# EAGLE board main LF (EAGLE 9.6.2)
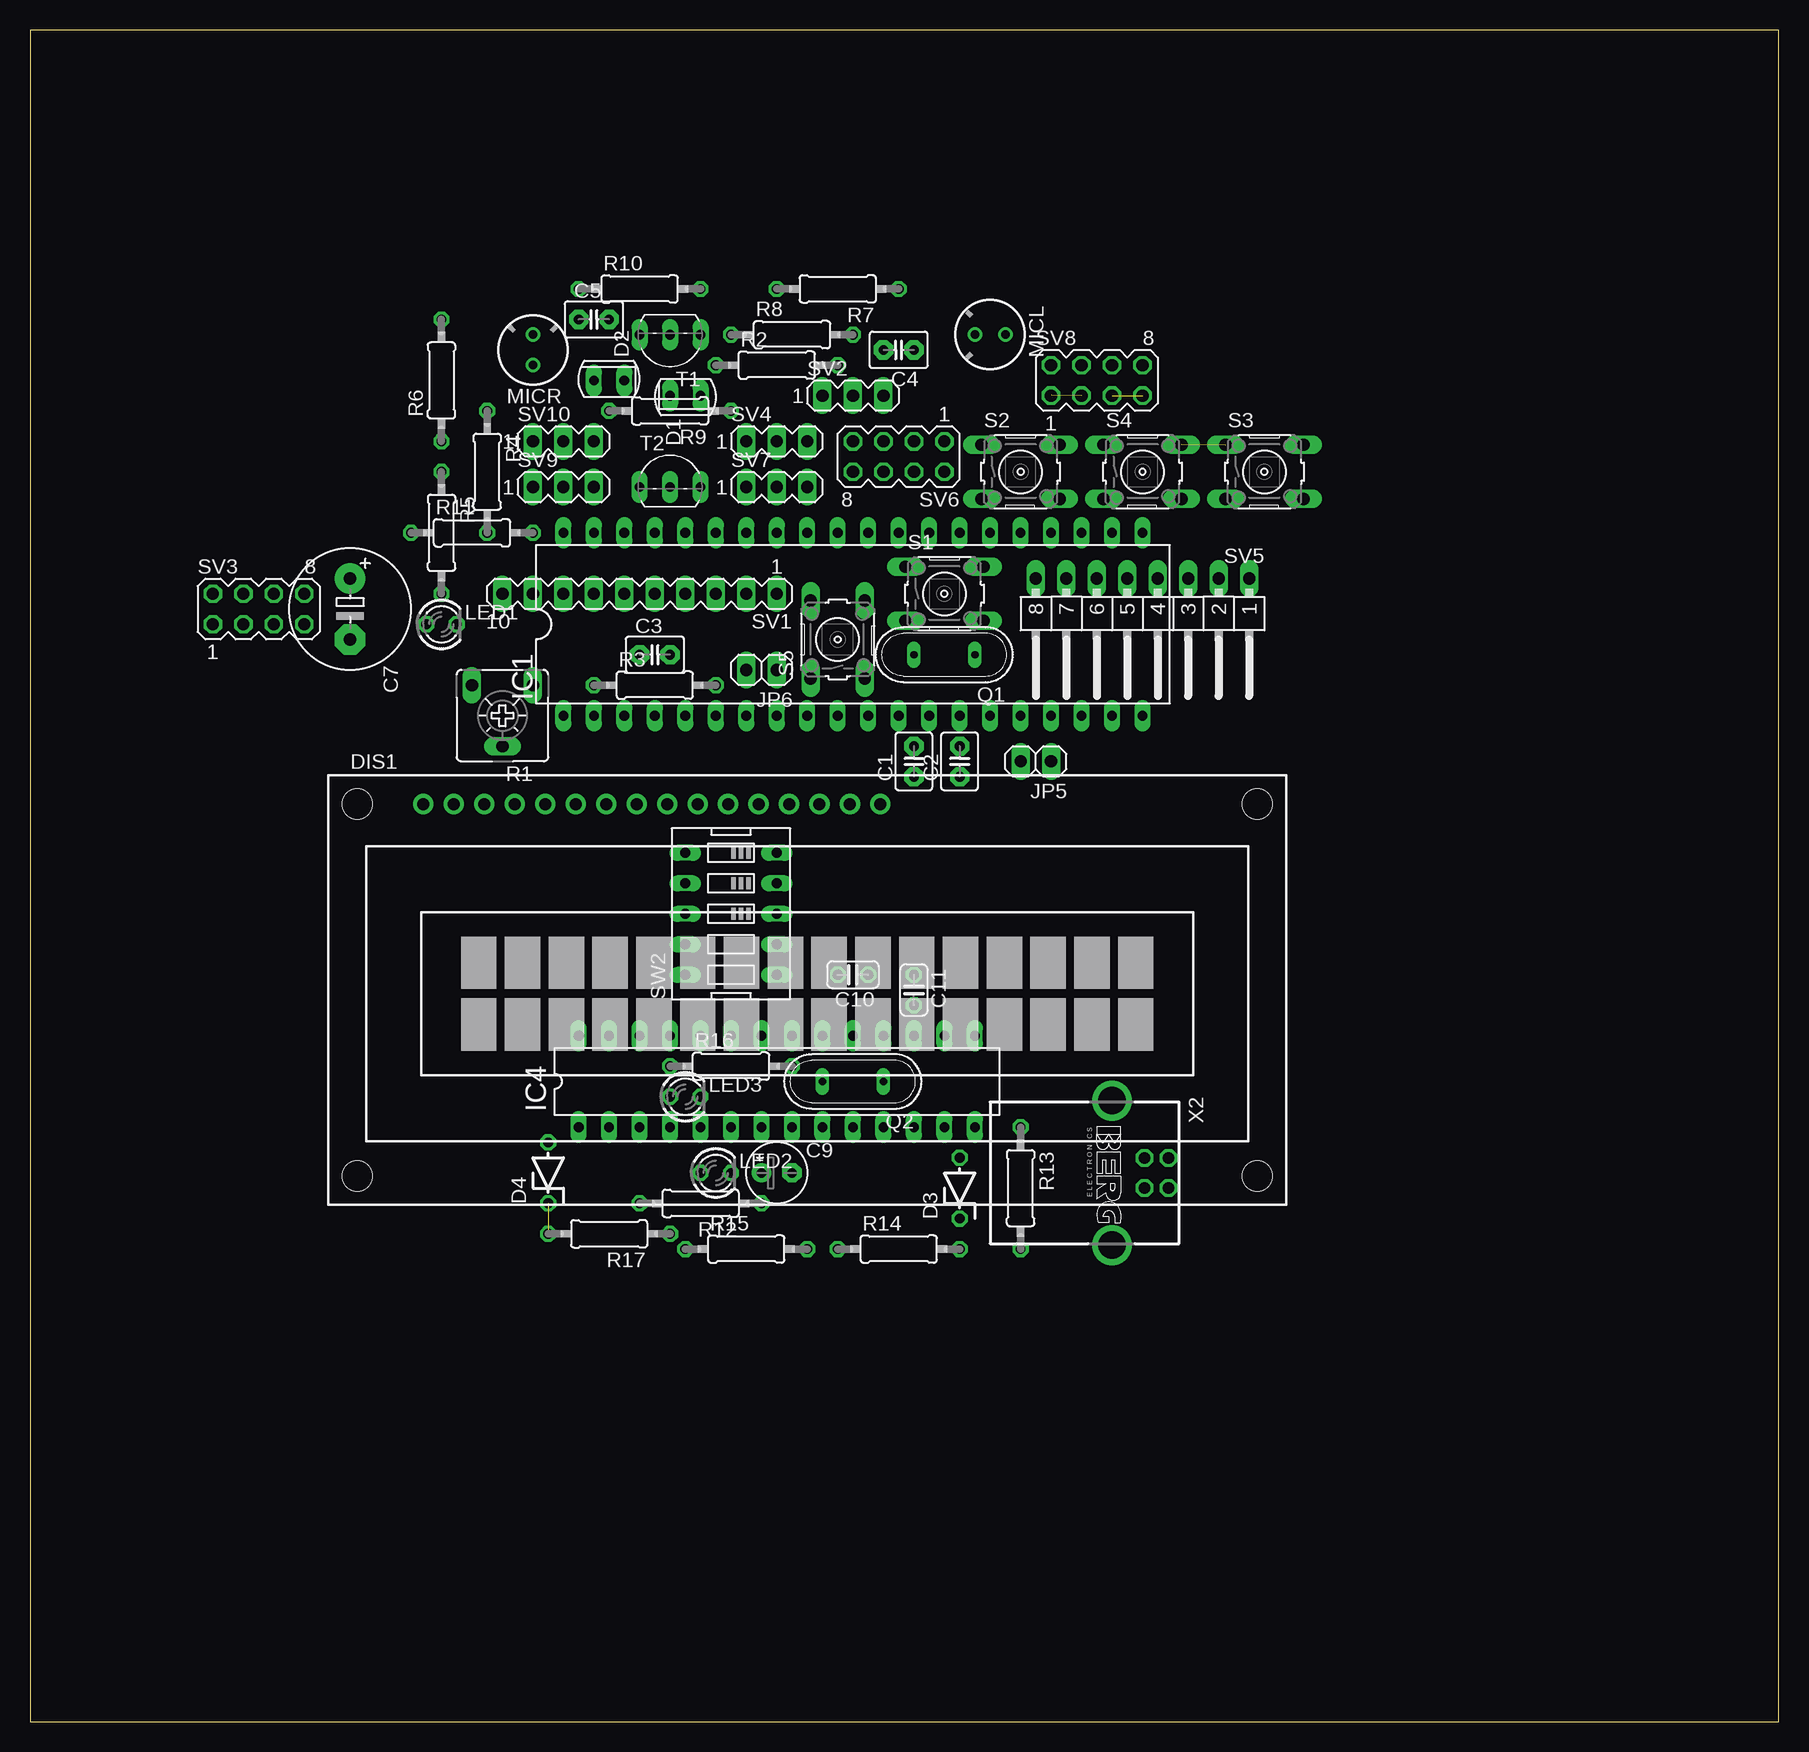
[diagram p0: board, top side]
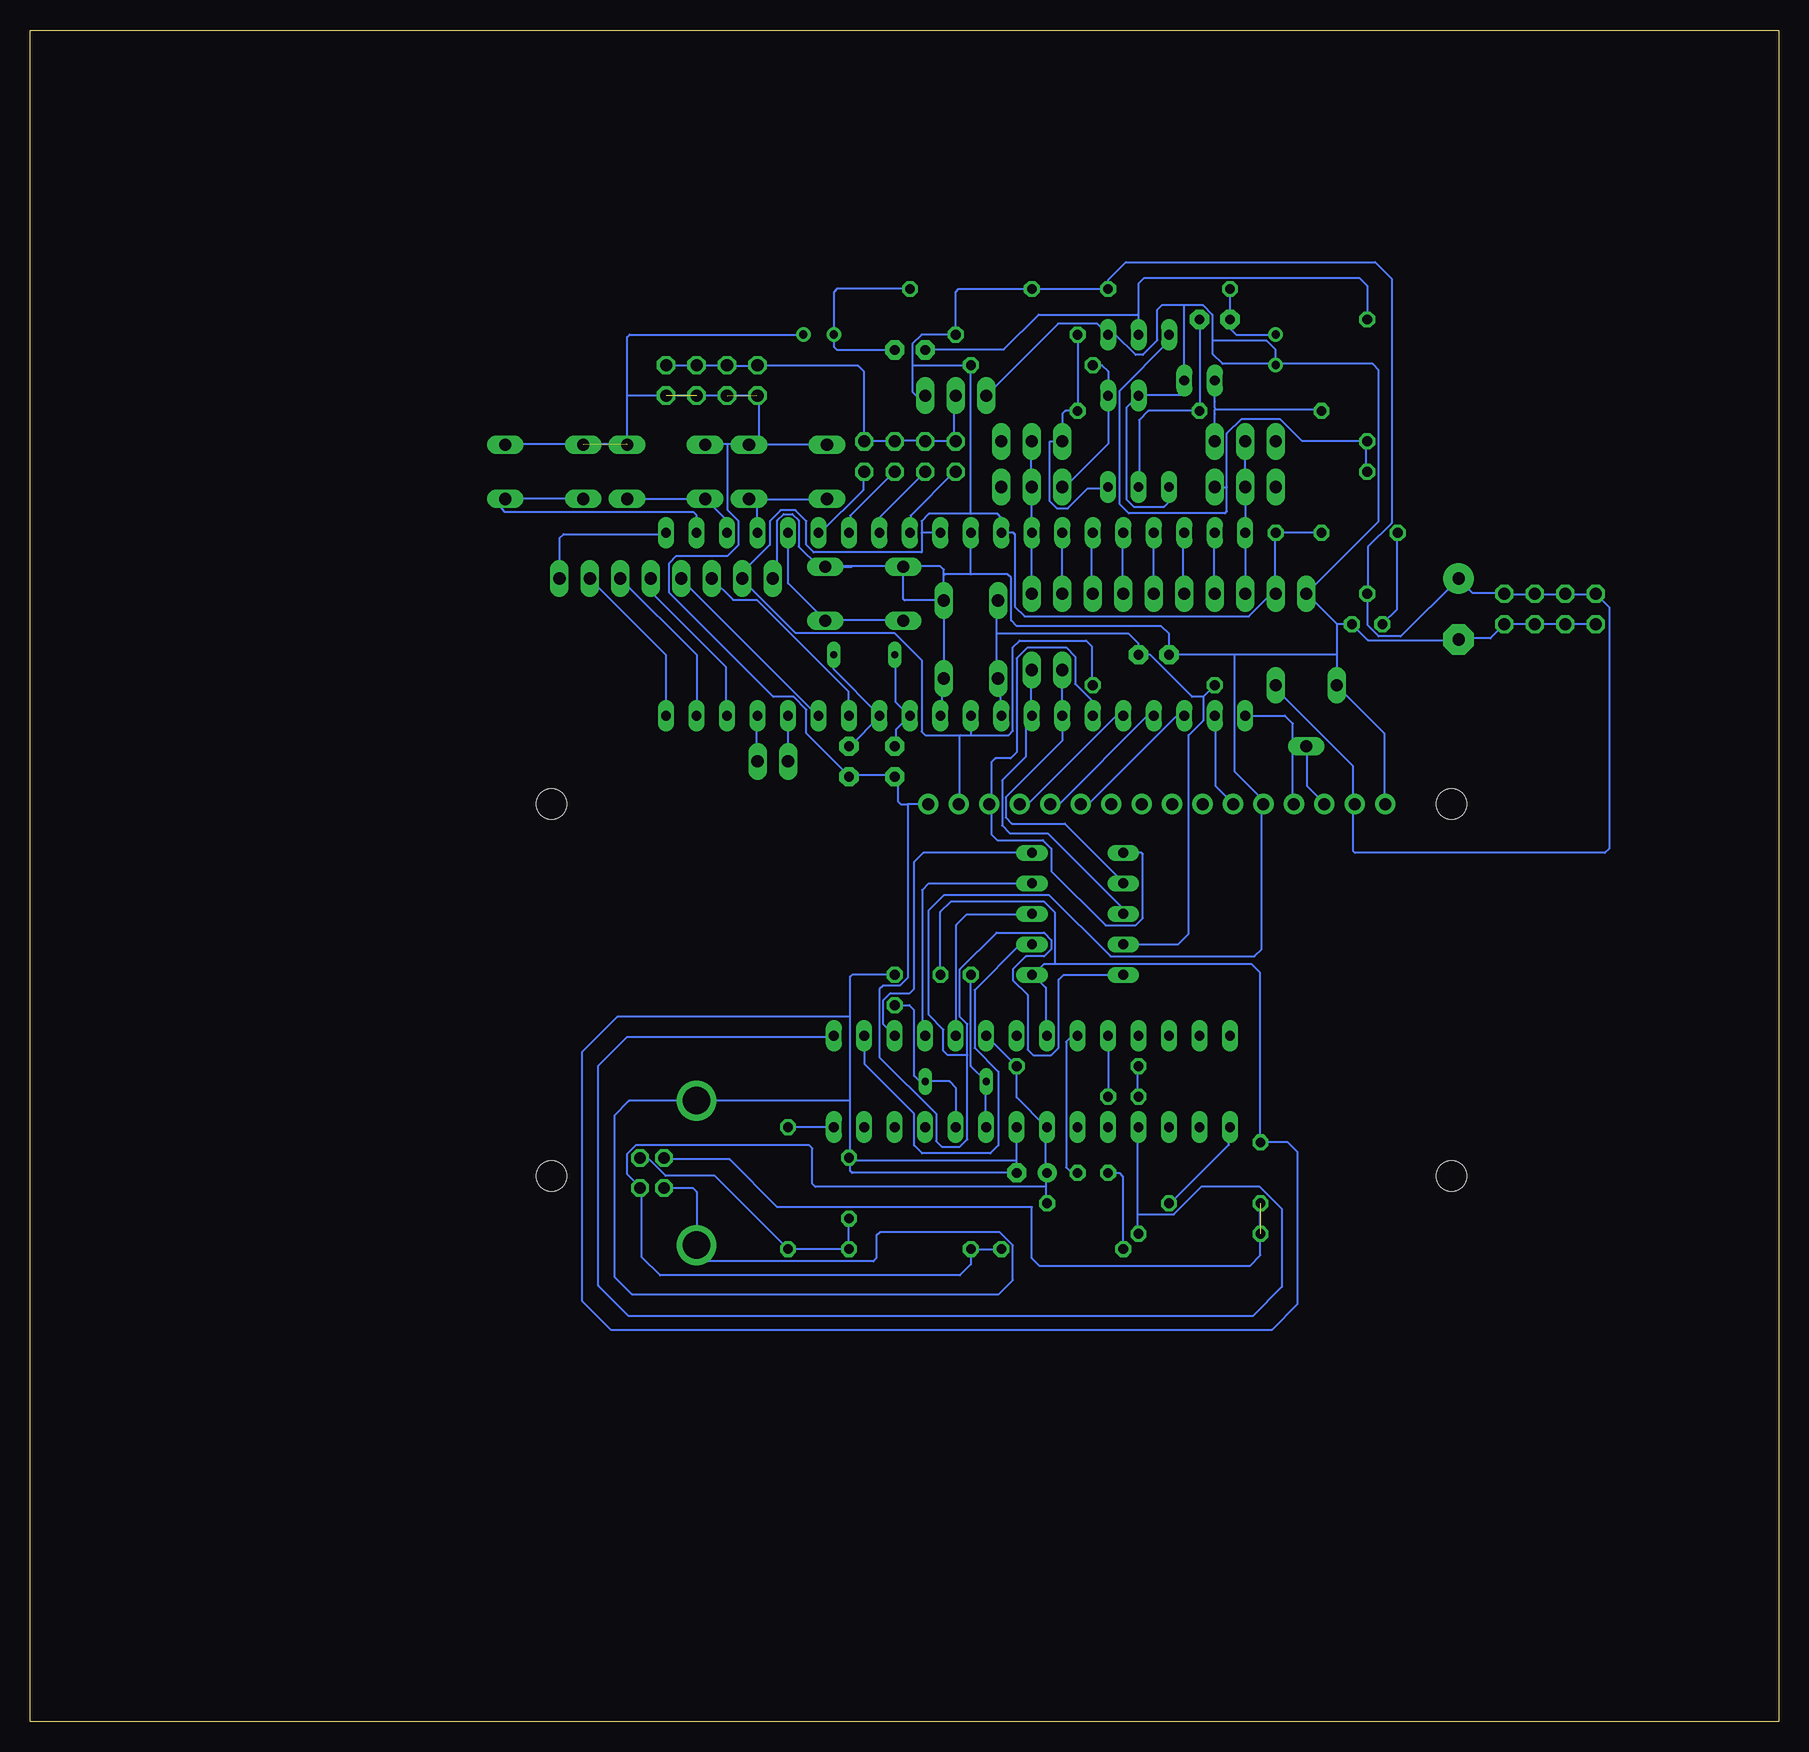
[diagram p1: board, bottom side, seen from below]

Size 145.72 x 140.96 mm. Coordinates in mm from the lower left corner, seen from the top.
Outline: 0,0 145.72,0 145.72,140.96 0,140.96 0,0
Copper layers (1*16): Top 0.035mm / dielectric 1.5mm / Bottom 0.035mm
Design rules "default": minimum track width 6mil, minimum drill 0.35mm, track to track 6mil, track to pad 6mil, pad to pad 6mil, via to via 6mil, smd to smd 6mil, copper to edge 40mil, drill to drill 6mil, minimum pad ring 10mil, minimum via ring 8mil, stop-mask expansion 4mil, vias tented up to drill 0mil, thermal gap 10mil

## Footprints (pad centres in the part's own frame; a part is rotated, then mirrored left to right if it is on the bottom)
C2.5-3 = drill 0.813 pad 1.6 octagon: 1 -1.27,0; 2 1.27,0
E5-10,5 = drill 1.016 pad 2.54: + -2.54,0 | drill 1.016 pad 2.54 octagon: - 2.54,0
E2,5-5 = drill 0.813 pad 1.6: + -1.27,0 | drill 0.813 pad 1.6 octagon: - 1.27,0
C025-024X044 = drill 0.813 octagon: 1 -1.27,0; 2 1.27,0
SFH225 = drill 0.813 long: A 0,1.27; K 0,-1.27
ZDIO-5 = drill 0.813 octagon: A 2.54,0; C -2.54,0
TUXGR_16X2_R2 = drill 1 pad 1.676: 1 -32,15.5; 2 -29.46,15.5; 3 -26.92,15.5; 4 -24.38,15.5; 5 -21.84,15.5; 6 -19.3,15.5; 7 -16.76,15.5; 8 -14.22,15.5; 9 -11.68,15.5; 10 -9.14,15.5; 11 -6.6,15.5; 12 -4.06,15.5; 13 -1.52,15.5; 14 1.02,15.5; 15 3.56,15.5; 16 6.1,15.5 | hole 2.5: -37.5,-15.5; 37.5,-15.5; -37.5,15.5; 37.5,15.5
DIL40 = drill 0.813 long: 1 -24.13,-7.62; 2 -21.59,-7.62; 3 -19.05,-7.62; 4 -16.51,-7.62; 5 -13.97,-7.62; 6 -11.43,-7.62; 7 -8.89,-7.62; 8 -6.35,-7.62; 9 -3.81,-7.62; 10 -1.27,-7.62; 11 1.27,-7.62; 12 3.81,-7.62; 13 6.35,-7.62; 14 8.89,-7.62; 15 11.43,-7.62; 16 13.97,-7.62; 17 16.51,-7.62; 18 19.05,-7.62; 19 21.59,-7.62; 20 24.13,-7.62; 21 24.13,7.62; 22 21.59,7.62; 23 19.05,7.62; 24 16.51,7.62; 25 13.97,7.62; 26 11.43,7.62; 27 8.89,7.62; 28 6.35,7.62; 29 3.81,7.62; 30 1.27,7.62; 31 -1.27,7.62; 32 -3.81,7.62; 33 -6.35,7.62; 34 -8.89,7.62; 35 -11.43,7.62; 36 -13.97,7.62; 37 -16.51,7.62; 38 -19.05,7.62; 39 -21.59,7.62; 40 -24.13,7.62
DIL28-3 = drill 0.813 long: 1 -16.51,-3.81; 2 -13.97,-3.81; 3 -11.43,-3.81; 4 -8.89,-3.81; 5 -6.35,-3.81; 6 -3.81,-3.81; 7 -1.27,-3.81; 8 1.27,-3.81; 9 3.81,-3.81; 10 6.35,-3.81; 11 8.89,-3.81; 12 11.43,-3.81; 13 13.97,-3.81; 14 16.51,-3.81; 15 16.51,3.81; 16 13.97,3.81; 17 11.43,3.81; 18 8.89,3.81; 19 6.35,3.81; 20 3.81,3.81; 21 1.27,3.81; 22 -1.27,3.81; 23 -3.81,3.81; 24 -6.35,3.81; 25 -8.89,3.81; 26 -11.43,3.81; 27 -13.97,3.81; 28 -16.51,3.81
1X02 = drill 1.016 long: 1 -1.27,0; 2 1.27,0
LED3MM = drill 0.813 octagon: A -1.27,0; K 1.27,0
F6050AP = drill 0.7 pad 1.2: 1 0,1.27; 2 0,-1.27
QS = drill 0.61 long: 1 -2.54,0; 2 2.54,0
CA6V = drill 1.016 long: A -2.54,-2.54; E 2.54,-2.54; S 0,2.54
0207/10 = drill 0.813 octagon: 1 -5.08,0; 2 5.08,0
B3F-10XX = drill 1.016 long: 1 -3.251,2.261; 2 3.251,2.261; 3 -3.251,-2.261; 4 3.251,-2.261
MA10-1 = drill 1.016 long: 1 -11.43,0; 2 -8.89,0; 3 -6.35,0; 4 -3.81,0; 5 -1.27,0; 6 1.27,0; 7 3.81,0; 8 6.35,0; 9 8.89,0; 10 11.43,0
MA03-1 = drill 1.016 long: 1 -2.54,0; 2 0,0; 3 2.54,0
MA04-2 = drill 1.016 octagon: 1 -3.81,-1.27; 2 -3.81,1.27; 3 -1.27,-1.27; 4 -1.27,1.27; 5 1.27,-1.27; 6 1.27,1.27; 7 3.81,-1.27; 8 3.81,1.27
MA08-1W = drill 1.016 long: 1 -8.89,0; 2 -6.35,0; 3 -3.81,0; 4 -1.27,0; 5 1.27,0; 6 3.81,0; 7 6.35,0; 8 8.89,0
EDG-05 = drill 0.813 long: 1 -5.08,-3.81; 2 -2.54,-3.81; 3 0,-3.81; 4 2.54,-3.81; 5 5.08,-3.81; 6 5.08,3.81; 7 2.54,3.81; 8 0,3.81; 9 -2.54,3.81; 10 -5.08,3.81
TO92-EBC = drill 0.813 long: B 0,-1.27; C 2.54,-1.27; E -2.54,-1.27
PN61729-S = drill 0.95 octagon: 1 1.25,4.71; 2 -1.25,4.71; 3 -1.25,2.71; 4 1.25,2.71 | drill 2.3 pad 2.9: S1 -6.02,0; S2 6.02,0

## Placement (x,y rotation side)
C1  22p  [C2.5-3]  73.66,80.01 90 top
C2  22p  [C2.5-3]  77.47,80.01 90 top
C3  10nF  [C2.5-3]  52.07,88.9 0 top
C4  100nF  [C2.5-3]  72.39,114.3 180 top
C5  100nF  [C2.5-3]  46.99,116.84 0 top
C7  1000uF/16V  [E5-10,5]  26.67,92.71 270 top
C9  10uF/16V  [E2,5-5]  62.23,45.72 0 top
C10  22pF  [C025-024X044]  68.58,62.23 180 top
C11  22pF  [C025-024X044]  73.66,60.96 270 top
D1  SFH225  [SFH225]  54.61,110.49 270 top
D2  SFH225  [SFH225]  48.26,111.76 90 top
D3  DZ3,6V  [ZDIO-5]  77.47,44.45 90 top
D4  DZ3,6V  [ZDIO-5]  43.18,45.72 90 top
DIS1  TUXGR_16X2_R2  [TUXGR_16X2_R2]  64.77,60.96 0 top
IC1  MEGA16-P  [DIL40]  68.58,91.44 0 top
IC4  MEGA8-P  [DIL28-3]  62.23,53.34 0 top
JP5  [1X02]  83.82,80.01 180 top
JP6  [1X02]  60.96,87.63 180 top
LED1  merah  [LED3MM]  34.29,91.44 0 top
LED2  Merah  [LED3MM]  57.15,45.72 0 top
LED3  hijau  [LED3MM]  54.61,52.07 0 top
MICL  MC  [F6050AP]  80.01,115.57 270 top
MICR  MC  [F6050AP]  41.91,114.3 180 top
Q1  8MHz  [QS]  76.2,88.9 180 top
Q2  12MHz  [QS]  68.58,53.34 180 top
R1  20K  [CA6V]  39.37,83.82 180 top
R2  56K  [0207/10]  62.23,113.03 0 top
R3  10K  [0207/10]  52.07,86.36 0 top
R4  56K  [0207/10]  38.1,104.14 270 top
R5  10K  [0207/10]  34.29,99.06 270 top
R6  100K  [0207/10]  34.29,111.76 90 top
R7  10K  [0207/10]  67.31,119.38 180 top
R8  10K  [0207/10]  63.5,115.57 0 top
R9  100K  [0207/10]  53.34,109.22 180 top
R10  10K  [0207/10]  50.8,119.38 0 top
R11  330  [0207/10]  36.83,99.06 0 top
R12  10K  [0207/10]  55.88,43.18 180 top
R13  68  [0207/10]  82.55,44.45 270 top
R14  2K2  [0207/10]  72.39,39.37 0 top
R15  330  [0207/10]  59.69,39.37 0 top
R16  330  [0207/10]  58.42,54.61 0 top
R17  68  [0207/10]  48.26,40.64 180 top
S1  [B3F-10XX]  76.2,93.98 0 top
S2  [B3F-10XX]  82.55,104.14 0 top
S3  [B3F-10XX]  102.87,104.14 0 top
S4  [B3F-10XX]  92.71,104.14 0 top
S5  [B3F-10XX]  67.31,90.17 90 top
SV1  [MA10-1]  50.8,93.98 180 top
SV2  [MA03-1]  68.58,110.49 0 top
SV3  [MA04-2]  19.05,92.71 0 top
SV4  [MA03-1]  62.23,106.68 0 top
SV5  [MA08-1W]  92.71,95.25 180 top
SV6  [MA04-2]  72.39,105.41 180 top
SV7  [MA03-1]  62.23,102.87 0 top
SV8  [MA04-2]  88.9,111.76 0 top
SV9  [MA03-1]  44.45,102.87 0 top
SV10  [MA03-1]  44.45,106.68 0 top
SW2  [EDG-05]  58.42,67.31 90 top
T1  [TO92-EBC]  53.34,114.3 180 top
T2  [TO92-EBC]  53.34,104.14 0 top
X2  PN61729-S  [PN61729-S]  90.17,45.72 270 top

## Library data of the parts
C1-C5 = capacitor-wima
C7 C9-C11 R2-R11 = rcl
D1 D2 = opto-trans-siemens; OC_FARNELL: unknown; OC_NEWARK: unknown
D3 D4 = diode
DIS1 = display-lcd; OC_FARNELL: unknown; OC_NEWARK: unknown
IC1 = atmel; MPN: ATMEGA16-16PU; OC_FARNELL: 9171142; OC_NEWARK: 01M6885
IC4 = atmel
JP5 JP6 = pinhead
LED1-LED3 = led
MICL MICR = microphon
Q1 Q2 SW2 = special
R1 = pot
R12-R17 = resistor
S1-S5 = switch-omron; MPN: B3F-1000; OC_FARNELL: 176432; OC_NEWARK: 36M3542
SV1-SV10 = con-lstb; OC_FARNELL: unknown; OC_NEWARK: unknown
T1 T2 = transistor
X2 = con-berg

## Nets
DGND: C9.- C10.1 C11.1 D3.A D4.A IC4.8 IC4.22 SW2.1 X2.4 X2.S1 X2.S2
GND: C1.1 C2.1 C3.1 C7.- D1.K D2.K DIS1.1 DIS1.5 DIS1.16 IC1.11 IC1.31 LED1.K MICL.1 MICR.1 R1.E S1.1 S1.2 S2.1 S2.2 S3.1 S3.2 S4.1 S4.2 S5.3 S5.4 SV1.10 SV2.1 SV3.1 SV3.3 SV3.5 SV3.7 SV5.8 SV8.1 SV8.3 SV8.5 SV8.7 SW2.10 T1.E T2.E
MISO: IC1.7 JP6.2 SW2.7
MOSI: DIS1.14 IC1.6 SW2.6
N$1: IC1.33 SV1.1 SV4.2 SV7.2
N$2: IC1.34 SV1.2
N$3: IC1.35 SV1.3
N$4: IC1.36 SV1.4
N$5: IC1.37 SV1.5
N$6: IC1.38 SV1.6
N$7: IC1.39 SV1.7
N$8: D2.A R4.1 SV10.3
N$9: IC1.24 S2.3 S2.4
N$10: DIS1.13 IC1.5
N$11: DIS1.12 IC1.4
N$12: DIS1.11 IC1.3
N$13: DIS1.6 IC1.2
N$14: R5.1 R6.1 SV9.3 T1.C
N$15: DIS1.3 R1.S
N$16: C1.2 IC1.12 Q1.2
N$17: C2.2 IC1.13 Q1.1
N$18: DIS1.4 IC1.1
N$19: D1.A R2.1 SV7.1
N$20: IC1.23 S4.3 S4.4
N$21: IC1.40 SV1.8 SV9.2 SV10.2
N$22: C4.2 R6.2 T1.B
N$23: C4.1 MICL.2 R7.1
N$24: R8.1 R9.1 SV4.1 T2.C
N$25: C5.2 R9.2 T2.B
N$26: C5.1 MICR.2 R10.1
N$27: IC1.22 S3.3 S3.4
N$28: IC1.25 S1.3 S1.4
N$30: IC1.21 SV5.1
N$32: IC1.20 SV5.2
N$33: IC1.19 SV5.3
N$34: IC1.18 SV5.4
N$35: IC1.15 SV5.5
N$36: IC1.14 SV5.6
N$37: IC1.16 JP5.2
N$38: IC1.17 JP5.1
N$41: LED1.A R11.1
N$42: IC4.1 R12.2
N$44: IC1.26 SV6.2
N$45: IC1.27 SV6.4
N$46: IC1.28 SV6.6
N$47: IC1.29 SV6.8
N$51: C10.2 IC4.9 Q2.2
N$52: C11.2 IC4.10 Q2.1
N$53: IC4.14 R13.1
N$55: LED2.A R15.1
N$56: LED3.A R16.1
N$57: IC4.23 LED2.K
N$58: IC4.24 LED3.K
N$59: D4.C R17.2 X2.3
N$67: IC4.4 IC4.15 R17.1
N$69: D3.C R13.2 R14.2 X2.2
N$175: IC4.17 SW2.5
N$176: IC4.18 SW2.4
N$177: IC4.19 SW2.3
N$178: IC4.16 SW2.2
RESET: C3.2 IC1.9 R3.1 S5.1 S5.2 SW2.9
SCK: IC1.8 JP6.1 SW2.8
VCC: C7.+ DIS1.2 DIS1.15 IC1.10 IC1.30 IC1.32 R1.A R2.2 R3.2 R4.2 R5.2 R7.2 R8.2 R10.2 R11.2 SV1.9 SV2.3 SV3.2 SV3.4 SV3.6 SV3.8 SV5.7
VDD: SV2.2 SV6.1 SV6.3 SV6.5 SV6.7 SV8.2 SV8.4 SV8.6 SV8.8
VPP: C9.+ IC4.7 IC4.20 R12.1 R14.1 R15.2 R16.2 X2.1

## Tracks (layer width: path | path; a pad name or v marks a point on that pad's centre or on a via)
DGND
  Bottom 0.152: 60.3,63.14 61.21,63.14 62.13,62.23 | 60.3,63.14 43.94,63.14 43.23,62.43 43.23,48.36 D4.A 40.89,48.26 40.08,47.45 40.08,34.8 42.22,32.66 97.33,32.66 99.72,35.05 99.72,55.78 96.77,58.72 77.37,58.72 | 62.13,62.23 61.06,61.16 61.06,57.2 IC4.22 | 62.13,62.23 SW2.1 | C10.1 69.85,67.46 68.99,68.33 61.21,68.33 60.3,67.41 60.3,63.14 | X2.4 90.49,44.47 90.17,44.14 X2.S2 90.17,38.61 89.92,38.35 75.44,38.35 75.18,38.61 75.18,40.49 74.88,40.79 64.92,40.79 63.81,39.67 63.81,36.78 64.97,35.61 95.55,35.61 97.03,37.08 97.03,50.49 95.81,51.71 90.17,51.71 | 63.5,46.79 C9.- 77.22,45.72 77.37,45.87 77.37,46.79 | 63.5,46.79 IC4.8 | C11.1 77.22,62.23 77.37,62.08 77.37,58.72 | 77.37,47.09 77.37,51.71 | 77.37,51.71 77.37,58.72 | 77.37,46.79 63.5,46.79 | 77.37,51.71 90.17,51.71 | 90.17,51.71 X2.S1 | 77.37,46.79 77.37,47.09 | D3.A 77.37,47.09
GND  (4 unrouted)
  Bottom 0.152: T2.E 50.8,101.65 51.21,101.24 53.75,101.24 54.36,101.85 54.36,109.47 D1.K 53.29,110.54 49.83,110.54 49.53,110.85 D2.K 49.53,118.01 | 47.19,115.06 47.19,117.25 47.95,118.01 49.53,118.01 | 47.19,115.06 47.19,114 46.33,113.13 33.83,113.13 33.33,112.62 33.33,100.03 SV1.10 39.27,93.93 36.83,91.49 | 49.53,118.01 51.41,118.01 51.77,117.65 51.77,115.11 52.98,113.89 53.59,113.89 55.27,115.57 T1.E 56.79,116.48 60.05,116.48 SV2.1 | 69.6,86.92 69.75,86.77 69.75,83.87 IC1.11 | 67.31,95.61 IC1.31 | 69.6,86.92 S5.3 | 17.78,91.49 15.34,91.49 SV3.1 | 17.78,91.49 20.22,91.49 SV3.5 20.37,91.49 22.81,91.49 SV3.7 24.03,90.27 26.62,90.27 C7.- 26.77,90.12 34.24,90.12 LED1.K 35.61,91.49 36.83,91.49 | 17.78,91.49 SV3.3 | 36.83,91.49 36.83,88.9 | 36.83,88.9 R1.E 36.83,86.31 32.87,82.35 32.87,76.56 DIS1.1 | 36.83,88.9 45.36,88.9 | 45.36,88.9 C3.1 50.8,90.63 51.46,91.29 63.47,91.29 63.96,91.77 63.96,95.3 64.26,95.61 67.31,95.61 | 45.36,88.9 45.36,79.2 43.08,76.91 43.08,76.56 DIS1.5 43.08,76.4 43.08,64.36 43.69,63.75 55.68,63.75 60.81,68.88 69.55,68.88 70.81,67.61 70.81,58.88 69.6,57.66 69.6,55.88 69.24,55.52 67.61,55.52 | 95.99,106.43 106.02,106.43 S3.2 | 84.99,106.43 85.75,106.43 S2.2 | 84.99,106.43 79.35,106.43 S2.1 | 87.58,106.43 85.9,106.43 S2.2 | 87.58,106.43 89.41,106.43 S4.1 | 85.14,110.54 SV8.1 | 84.99,106.43 84.99,110.39 SV8.1 | 84.99,106.43 S2.2 | SW2.10 59.59,62.23 60,61.82 60,56.13 60.6,55.52 62.13,55.52 62.59,55.98 62.59,60.55 63.81,61.77 63.81,62.69 62.74,63.75 61.21,63.75 60.6,64.36 60.6,65.13 61.21,65.73 65.18,65.73 68.22,62.69 68.22,58.72 67.61,58.11 67.61,55.52
  Bottom 0.152: 67.61,55.52 67.61,48.51 68.22,47.9 69.75,47.9 70.21,48.36 70.21,50.65 74.93,55.37 74.93,61.01 74.62,61.32 73.25,61.32 72.59,61.98 72.59,76.46 | 87.58,106.43 87.58,100.94 86.66,100.03 86.66,98.04 87.58,97.13 91.85,97.13 92.46,96.52 92.46,94.08 83.77,85.39 82.09,85.39 81.03,84.33 81.03,82.35 77.52,78.84 C2.1 77.37,78.84 73.71,78.84 C1.1 73.41,78.49 73.41,76.71 73.16,76.46 72.59,76.46 | MICL.1 95.76,115.57 95.96,115.37 95.96,110.49 | S4.2 95.96,110.49 | 95.96,110.49 SV8.7 SV8.1 | MICR.1 41.91,114.3 42.67,115.06 47.19,115.06 | DIS1.16 72.59,76.46 | 72.97,96.27 S1.1 72.95,93.52 72.85,93.42 S5.4 | 77.22,96.27 69.85,96.27 69.57,95.99 69.57,95.5 | 77.22,96.27 80.01,96.27 81.66,97.92 81.66,100.09 82.18,100.61 82.92,100.61 83.44,100.09 83.44,95.63 SV5.8 | S5.4 69.57,86.94 69.6,86.92 | S5.4 69.57,95.5 | 67.31,95.61 69.47,95.61 69.57,95.5 | S1.2 77.24,96.24 77.22,96.27
MISO
  Bottom 0.152: SW2.7 54.61,69.95 59.49,74.83 63.91,74.83 64.41,75.34 64.41,77.01 59.69,81.74 IC1.7 JP6.2
MOSI
  Bottom 0.152: SW2.6 53.09,72.39 52.98,72.29 52.98,66.95 53.59,66.34 56.08,66.34 60.6,70.87 60.6,72.75 61.32,73.46 65.13,73.46 65.61,73.94 65.61,76.64 | 65.61,76.64 65.61,79.93 65.28,80.26 64.01,80.26 63.5,80.77 63.5,88.59 62.59,89.51 59.39,89.51 58.62,88.75 58.62,86.46 57.25,85.09 57.25,83.92 IC1.6 | DIS1.14 65.61,76.64
N$1
  Bottom 0.152: SV1.1 62.28,94.08 62.28,98.96 IC1.33 62.28,99.11 62.28,102.77 SV7.2 62.28,102.92 62.28,106.58 SV4.2
N$2
  Bottom 0.152: SV1.2 IC1.34
N$3
  Bottom 0.152: IC1.35 57.25,98.96 57.25,94.08 SV1.3
N$4
  Bottom 0.152: IC1.36 54.66,98.96 54.66,94.08 SV1.4
N$5
  Bottom 0.152: SV1.5 IC1.37
N$6
  Bottom 0.152: IC1.38 49.63,98.96 49.63,94.08 SV1.6
N$7
  Bottom 0.152: IC1.39 47.04,98.96 47.04,94.08 SV1.7
N$8
  Bottom 0.152: R4.1 38.2,109.32 46.99,109.32 | 46.89,111.76 D2.A 46.99,109.98 46.99,109.47 46.99,109.32 | SV10.3 46.99,108.97 46.99,109.32
N$9
  Bottom 0.152: 85.14,101.24 85.14,99.11 IC1.24 | 85.14,101.24 85.75,101.85 S2.4 85.14,101.24 | 85.14,101.24 84.53,101.85 79.35,101.85 S2.3
N$10
  Bottom 0.152: IC1.5 54.66,83.72 55.27,83.72 62.43,76.56 63.19,76.56 DIS1.13
N$11
  Bottom 0.152: IC1.4 52.07,83.72 52.68,83.72 59.84,76.56 60.6,76.56 DIS1.12
N$12
  Bottom 0.152: IC1.3 49.63,83.72 50.24,83.72 57.4,76.56 58.17,76.56 DIS1.11
N$13
  Bottom 0.152: IC1.2 46.89,83.72 46.89,77.93 45.52,76.56 DIS1.6
N$14
  Bottom 0.152: R5.1 34.39,104.14 34.39,106.58 R6.1 34.39,106.73 39.73,106.73 41.55,108.56 44.75,108.56 45.97,107.34 45.97,102.87 | T1.C 50.85,115.57 50.85,114.96 54.92,110.9 54.92,101.45 54.15,100.69 46.13,100.69 45.97,100.84 45.97,102.87 | SV9.3 45.97,102.87
N$15
  Bottom 0.152: R1.S 39.27,81.28 39.27,77.93 37.9,76.56 DIS1.3
N$16
  Bottom 0.152: Q1.2 73.56,88.9 73.56,84.94 72.49,83.87 IC1.12 73.56,82.65 73.56,81.28 C1.2
N$17
  Bottom 0.152: Q1.1 78.74,87.68 74.93,83.87 IC1.13 74.93,83.72 77.37,81.28 C2.2
N$18
  Bottom 0.152: IC1.1 41.15,83.82 40.49,83.16 40.49,76.56 DIS1.4
N$19
  Bottom 0.152: R2.1 56.39,113.03 55.88,112.52 D1.A 55.88,106.48 59.49,102.87 SV7.1
N$20
  Bottom 0.152: IC1.23 87.73,99.11 87.73,100.18 89.41,101.85 S4.3 89.56,101.85 95.96,101.85 S4.4
N$21
  Bottom 0.152: SV1.8 IC1.40 SV9.2 SV10.2
N$22
  Bottom 0.152: C4.2 71.12,114.35 64.57,114.35 61.67,117.25 53.44,117.25 53.34,117.35 | T1.B 53.34,117.35 | 53.34,117.35 53.34,119.84 52.88,120.29 34.95,120.29 34.29,119.63 R6.2
N$23
  Bottom 0.152: R7.1 78.49,119.38 78.74,119.13 MICL.2 78.74,114.55 78.49,114.3 C4.1
N$24
  Bottom 0.152: T2.C 55.88,102.77 57.56,102.77 59.23,101.09 60.15,101.09 60.76,101.7 60.76,106.63 60.71,106.68 SV4.1 59.69,108.97 59.44,109.22 R9.1 R8.1
N$25
  Bottom 0.152: C5.2 R9.2 52.53,109.22 53.29,108.46 53.29,102.92 T2.B
N$26
  Bottom 0.152: MICR.2 45.21,115.57 45.72,116.08 C5.1 R10.1
N$27
  Bottom 0.152: IC1.22 90.17,100.53 90.42,100.79 106.12,100.79 106.43,101.09 106.43,101.57 S3.4 S3.3
N$28
  Bottom 0.152: IC1.25 82.55,94.84 79.5,91.8 S1.4 79.35,91.8 72.95,91.8 S1.3
N$30
  Bottom 0.152: IC1.21 92.76,98.96 101.24,98.96 101.6,98.6 SV5.1
N$32
  Bottom 0.152: IC1.20 92.76,83.87 92.76,88.9 99.01,95.15 SV5.2
N$33
  Bottom 0.152: IC1.19 90.17,88.9 SV5.3
N$34
  Bottom 0.152: IC1.18 87.73,83.87 87.73,87.88 93.98,94.13 SV5.4
N$35
  Bottom 0.152: IC1.15 80.11,83.87 91.39,95.15 SV5.5
N$36
  Bottom 0.152: SV5.6 87.12,93.47 85.14,93.47 77.52,85.85 77.52,83.87 IC1.14
N$37
  Bottom 0.152: JP5.2 IC1.16
N$38
  Bottom 0.152: IC1.17 85.14,83.72 85.14,80.06 JP5.1
N$41
  Bottom 0.152: R11.1 31.8,98.96 31.8,92.71 33.02,91.49 LED1.A
N$42
  Bottom 0.152: IC4.1 45.82,49.43 45.82,48.06 50.7,43.18 R12.2
N$44
  Bottom 0.152: SV6.2 76.3,104.14 76.3,102.62 79.86,99.06 IC1.26
N$45
  Bottom 0.152: IC1.27 77.37,99.11 77.37,100.48 73.71,104.14 SV6.4
N$46
  Bottom 0.152: IC1.28 74.93,100.33 SV6.6
N$47
  Bottom 0.152: IC1.29 72.34,99.11 72.34,100.48 68.68,104.14 SV6.8
N$51
  Bottom 0.152: IC4.9 66.09,49.58 66.09,53.24 Q2.2 67.31,54.61 C10.2
N$52
  Bottom 0.152: IC4.10 68.58,52.83 69.09,53.34 Q2.1 71.58,53.34 72.03,53.8 72.03,59.28 72.44,59.69 C11.2
N$53
  Bottom 0.152: IC4.14 78.74,49.58 82.55,49.58 R13.1
N$55
  Bottom 0.152: LED2.A 54.97,45.72 54.66,45.41 54.66,39.37 R15.1
N$56
  Bottom 0.152: LED3.A 53.44,52.17 53.44,54.61 R16.1
N$57
  Bottom 0.152: IC4.23 58.88,57.15 59.39,56.64 59.39,46.18 58.93,45.72 LED2.K
N$58
  Bottom 0.152: IC4.24 LED3.K
N$59  (1 unrouted)
  Bottom 0.152: 43.23,43.18 D4.C 43.18,38.86 44.09,37.95 61.57,37.95 62.23,38.61 62.23,42.88 83.46,42.88 87.43,46.84 92.76,46.84 X2.3
N$67
  Bottom 0.152: 53.44,42.27 53.44,49.43 IC4.4 | 53.44,42.27 53.44,40.74 R17.1 | 53.44,42.27 50.39,42.27 48.06,44.6 43.28,44.6 41.4,42.72 41.4,36.22 43.84,33.78 95.81,33.78 98.35,36.32 98.35,54.66 95.96,57.05 78.74,57.05 IC4.15
N$69
  Bottom 0.152: 77.52,39.37 77.52,41.81 D3.C | 77.52,39.37 R13.2 88.65,45.47 92.76,45.47 94.13,46.84 94.74,46.84 X2.2 | 77.52,39.37 R14.2
N$175
  Bottom 0.152: SW2.5 71.27,72.39 72.03,71.63 72.03,61.06 72.39,60.71 74.02,60.71 74.62,60.1 74.62,58.11 IC4.17
N$176
  Bottom 0.152: SW2.4 70.81,69.85 71.37,69.29 71.37,57.4 IC4.18
N$177
  Bottom 0.152: SW2.3 62.28,67.26 67.67,67.26 68.53,66.4 68.53,57.2 IC4.19
N$178
  Bottom 0.152: SW2.2 63.19,64.77 67,60.96 67,56.13 65.02,54.15 65.02,48.01 65.68,47.35 71.37,47.35 72.03,48.01 72.03,50.65 76.15,54.76 76.15,57.05 IC4.16
RESET
  Bottom 0.152: IC1.9 64.87,83.87 64.87,86.77 65.02,86.92 S5.1 65.18,86.92 65.18,90.63 | 65.18,90.63 65.18,93.32 S5.2 | 47.95,85.39 47.95,83.41 49.17,82.19 49.17,65.63 50.04,64.77 SW2.9 | R3.1 47.95,85.39 | 47.95,85.39 48.87,85.39 52.38,88.9 C3.2 53.34,89.81 54.15,90.63 65.18,90.63
SCK
  Bottom 0.152: JP6.1 62.28,87.53 62.28,83.87 IC1.8 62.28,83.72 62.74,83.26 62.74,80.42 64.72,78.44 64.72,74.68 64.06,74.02 60.91,74.02 54.61,67.72 SW2.8
VCC
  Bottom 0.152: 35.46,76.61 35.46,79.6 41.86,86 41.86,86.31 R1.A | 17.78,93.93 15.34,93.93 SV3.2 14.12,92.86 14.12,72.75 14.48,72.39 35.31,72.39 35.46,72.54 35.46,76.61 | 17.78,93.93 20.22,93.93 SV3.6 20.37,93.93 22.81,93.93 SV3.8 22.96,94.08 25.55,94.08 26.62,95.15 C7.+ 31.5,90.42 33.33,90.42 34.24,91.34 34.24,93.93 R5.2 34.24,94.08 34.24,97.89 32.26,99.87 32.26,120.24 33.63,121.62 54.41,121.62 55.88,120.14 R10.2 R7.2 | 17.78,93.93 SV3.4 | 62.28,119.38 R7.2 | R3.2 57.25,86.46 57.25,89.61 57.71,90.07 63.25,90.07 63.81,89.51 63.81,82.55 64.16,82.19 67.31,82.19 | DIS1.15 68.22,76.56 68.22,82.14 68.17,82.19 | R4.2 38.2,99.11 41.86,99.11 R11.2 42.01,98.96 42.01,94.08 SV1.9 42.01,93.93 42.32,93.93 44.14,92.1 62.84,92.1 63.65,92.91 63.65,98.96 63.75,99.06 IC1.32 64.77,100.33 65.08,100.63 67.31,100.63 | 67.31,100.63 67.31,112.98 | 67.31,112.98 R2.2 | 68.17,82.19 67.31,82.19 | IC1.10 67.31,82.19 | 68.17,82.19 71.12,82.19 71.42,82.5 71.42,88.44 73.71,90.73 81.94,90.73 86.36,95.15 SV5.7 86.36,95.76 84.07,98.04 84.07,100.03 83.16,100.94 81.94,100.94 81.03,100.03 81.03,98.04 80.42,97.43 71.42,97.43 71.42,99.06 | DIS1.2 35.46,76.61 | 71.42,99.06 71.42,100.03 70.81,100.63 67.31,100.63 | IC1.30 71.42,99.06 | R7.2 68.33,119.38 68.58,119.13 R8.2 71.42,115.57 72.19,114.81 72.19,113.03 | SV2.3 71.88,110.49 72.19,110.79 72.19,113.03 | 67.31,112.98 72.14,112.98 72.19,113.03
VDD
  Bottom 0.152: 90.17,112.98 87.73,112.98 SV8.4 87.58,112.98 85.14,112.98 SV8.2 84.99,112.98 76.71,112.98 76.2,112.47 SV6.1 76.15,106.73 73.71,106.73 SV6.3 73.56,106.73 71.12,106.73 | 90.17,112.98 92.61,112.98 SV8.8 | 90.17,112.98 SV8.6 | 71.12,106.73 68.68,106.73 | 68.68,106.73 68.68,110.39 SV2.2 | 68.68,106.73 SV6.7 | 71.12,106.73 SV6.5
VPP
  Bottom 0.152: IC4.20 R16.2 63.5,52.02 61.06,49.58 IC4.7 61.06,49.43 61.06,45.77 C9.+ 61.06,45.62 61.06,44.55 | 61.06,44.55 61.06,43.18 R12.1 | R15.2 R14.1 67.31,38.1 68.22,37.19 93.22,37.19 94.74,38.71 94.74,44.4 X2.1 94.89,44.55 95.96,45.62 95.96,47.29 95.2,48.06 80.82,48.06 80.52,47.75 80.52,44.81 80.26,44.55 61.06,44.55